# Altium PCB 2401_Test_Board_V1.1.PCBDOC (part 1 of 2)
Units mm, origin at the board's own origin, x right, y up, seen from the top; angles counter-clockwise.
Board outline 36.53 x 36.61 mm, 2 copper layers (Top Layer, Bottom Layer); 40 components, 34 nets, 129 pads, 21 vias.
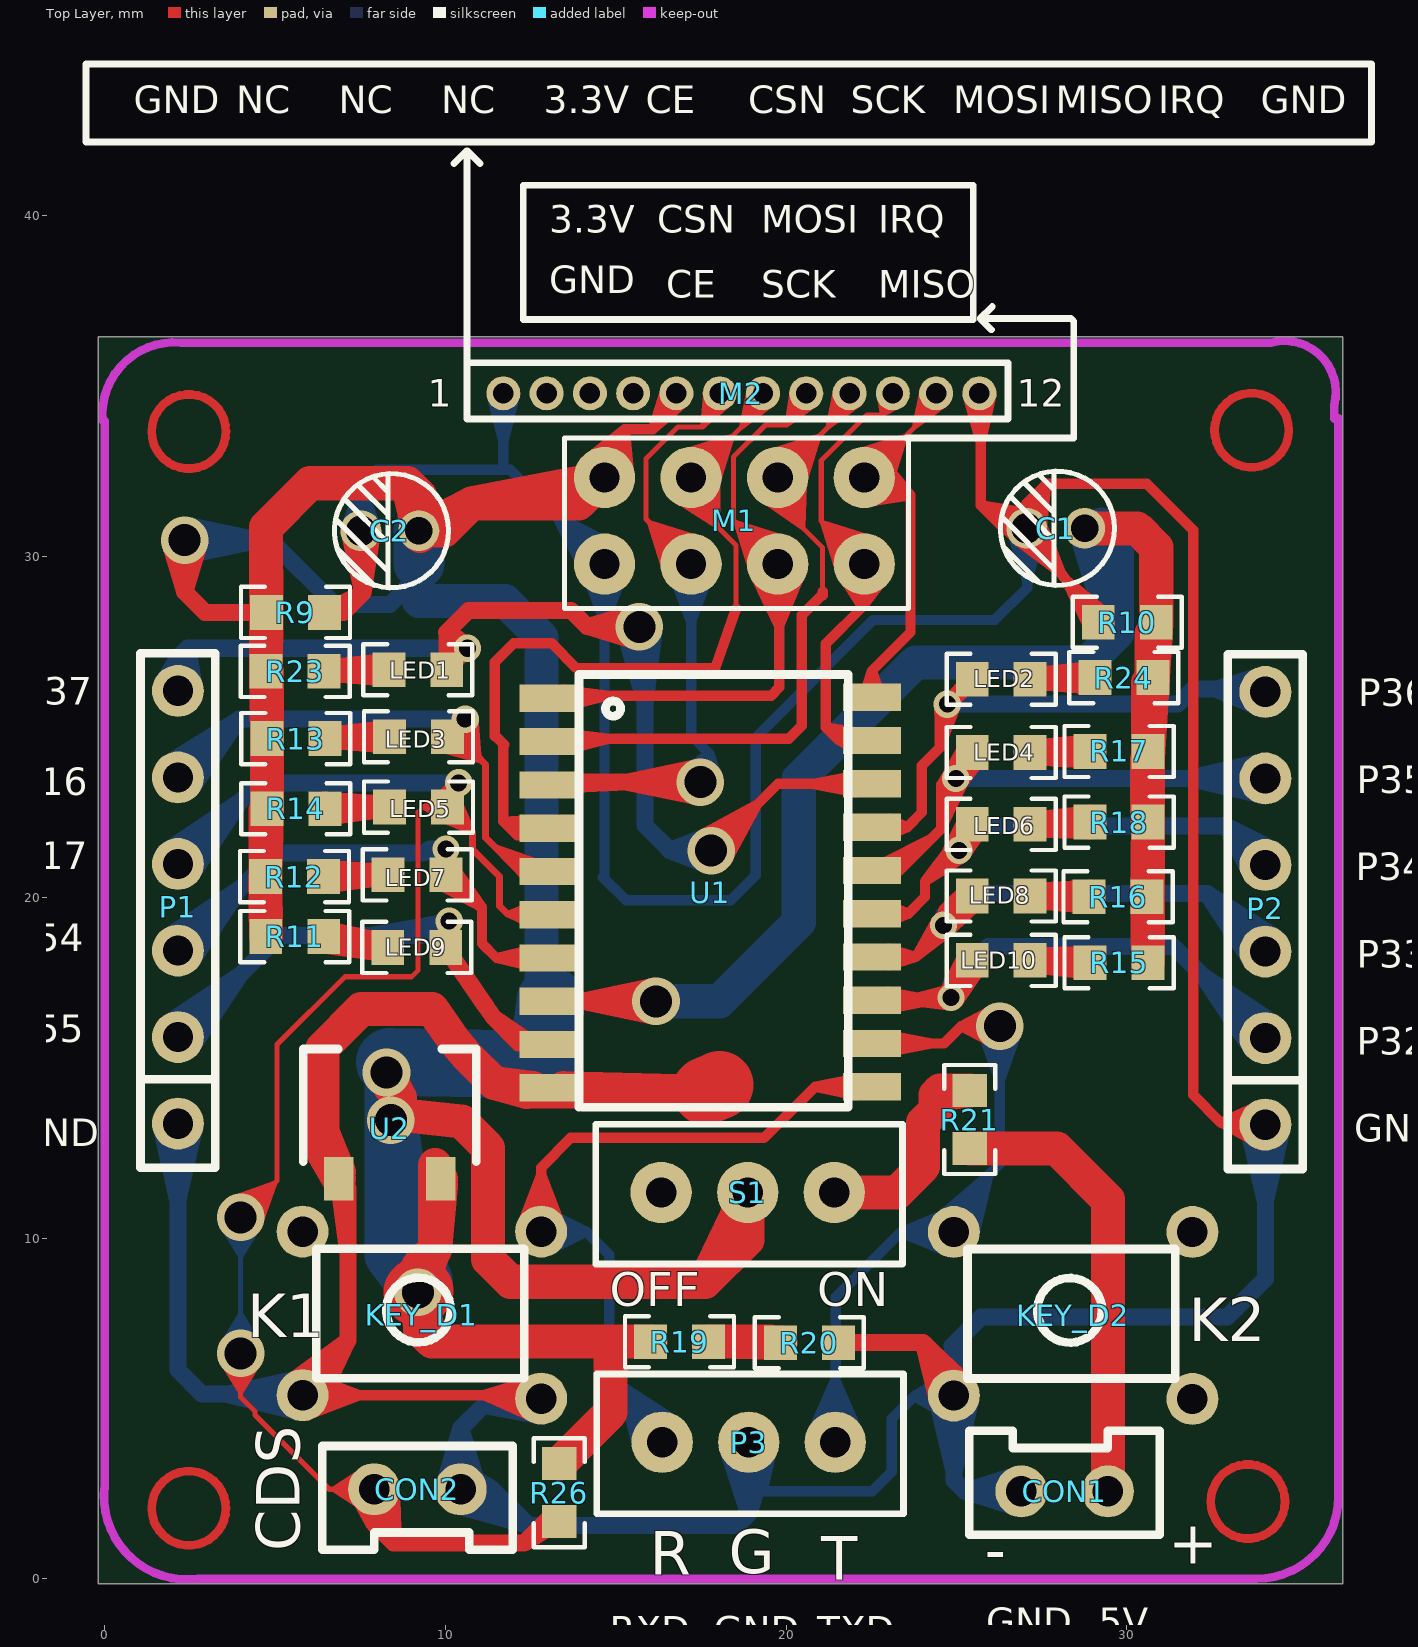
[diagram p0: Top Layer view]
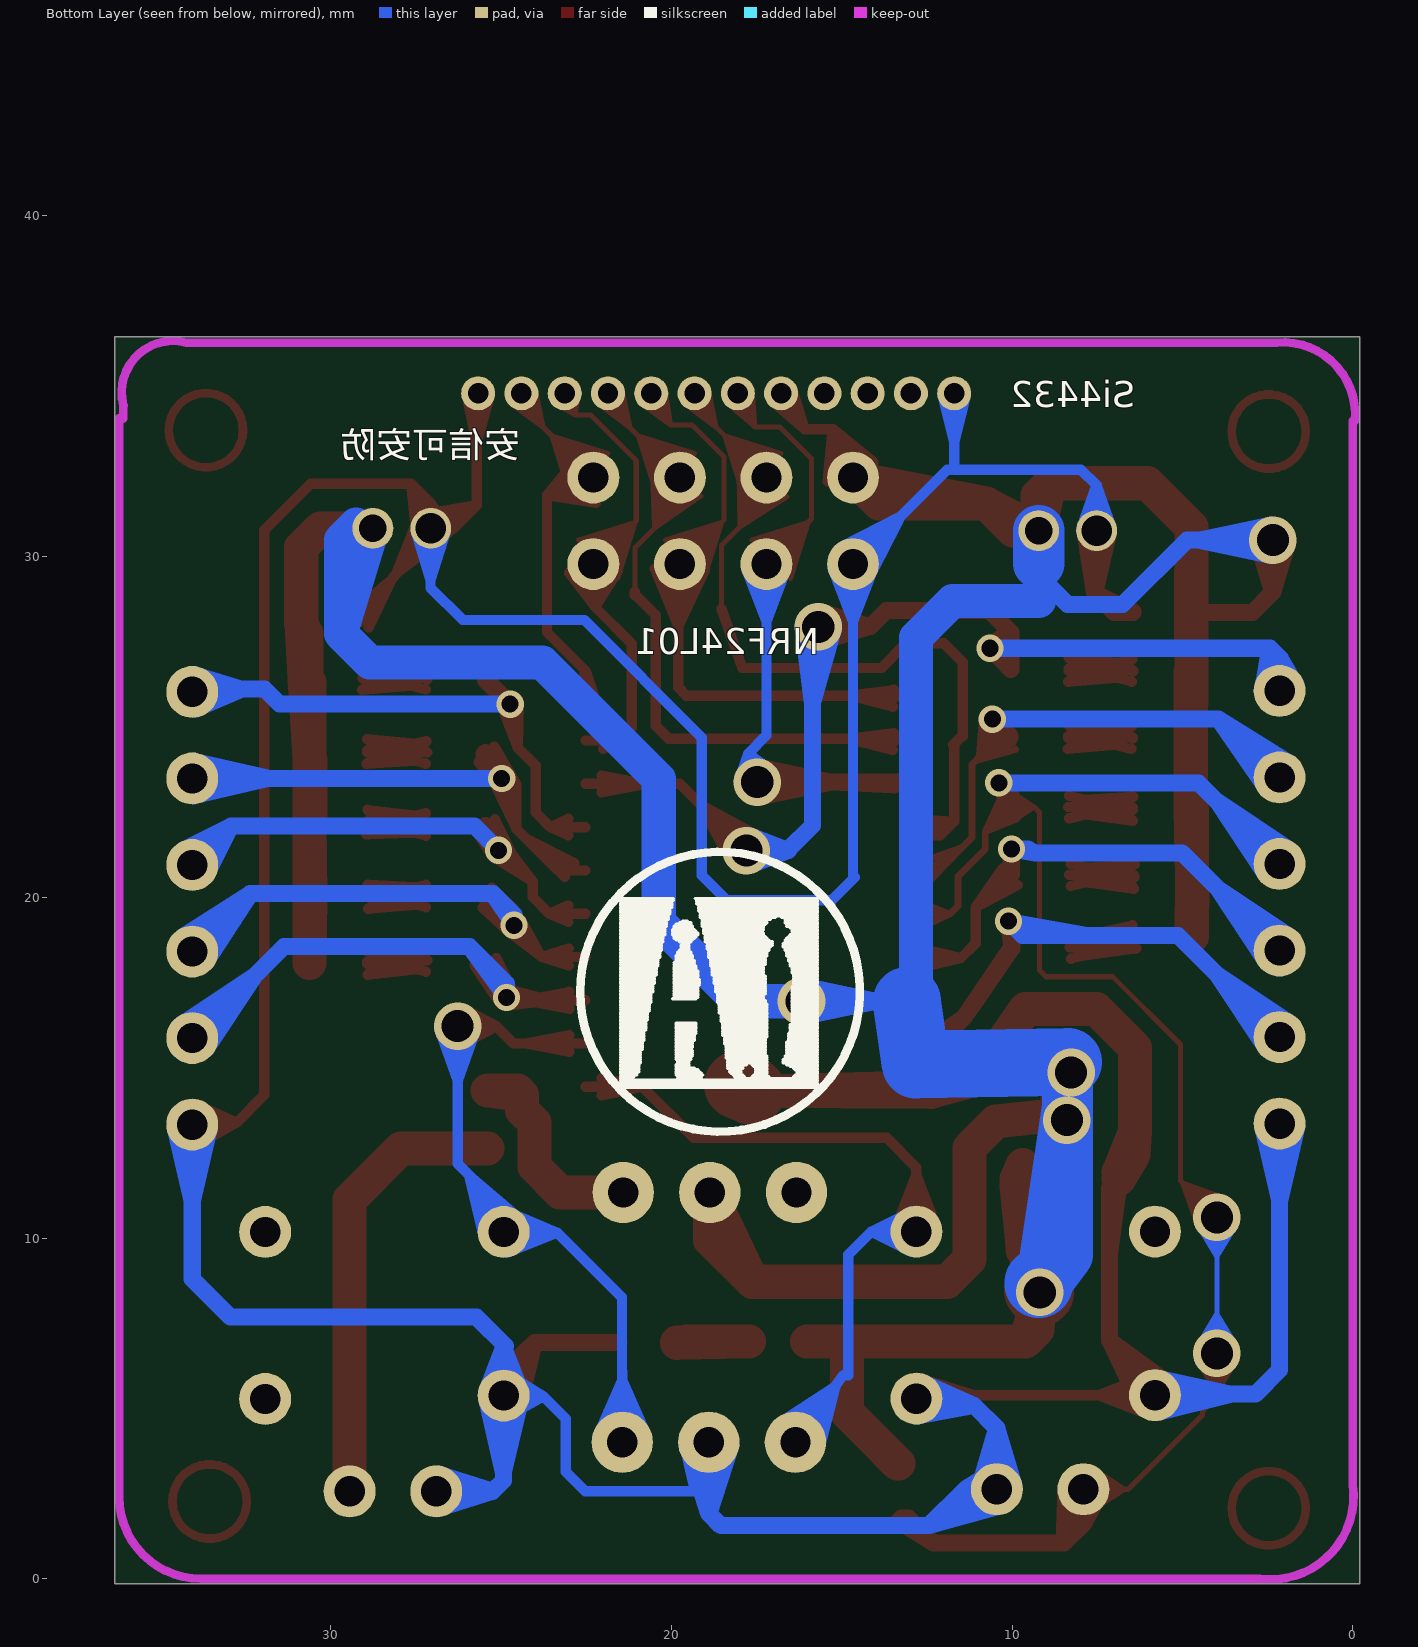
[diagram p1: Bottom Layer view, seen from below]

## Layer stack, top to bottom
Top Solder: solder mask 0.0102, Solder Resist, Dk 3.5
Top Layer: signal copper 0.0356
Dielectric 1: dielectric 0.32, FR-4, Dk 4.8
Bottom Layer: signal copper 0.0356
Bottom Solder: solder mask 0.0102, Solder Resist, Dk 3.5

## Board outline
-0.194,-0.149 36.337,-0.149 36.337,36.456 -0.194,36.456

## Design rules (kind name [scope] priority, off if disabled: settings)
Clearance [All] p1: gap=0.254
PolygonConnect [All] p1: connectstyle=Relief reliefconductorwidth=0.254 reliefentries=4 polygonreliefangle="90 Angle" airgapwidth=0.254
RoutingVias [All] p1: holewidth=0.711 width=1.27 viastyle="Through Hole" minholewidth=0.711 minwidth=1.27 maxholewidth=0.711 maxwidth=1.27
SolderMaskExpansion [All] p1: expansion=0.102
Width [All] p1: maxlimit=0.254 minlimit=0.254 preferedwidth=0.254
30 further rules are at their usual default settings.

## Components (designator, comment, footprint, x,y, rotation, side; value= is the part's Value field where it differs from the comment)
C1 "EC-7" EC-7 28.76,30.828 r180 top
C2 "EC-7" EC-7 9.22,30.758 r180 top
CON1 "2PIN" 2PIN 26.9,2.568 r0 top
CON2 "2PIN" 2PIN 10.45,2.628 r180 top
KEY_D1 "SW" SW 6.31,4.788 r0 top
KEY_D2 "SW" SW 25.42,4.778 r0 top
LED1 "0603-RES-A" 0603-RES-A 9.19,26.678 r180 top
LED2 "0603-RES-A" 0603-RES-A 26.31,26.398 r180 top
LED3 "0603-RES-A" 0603-RES-A 9.21,24.708 r180 top
LED4 "0603-RES-A" 0603-RES-A 26.31,24.248 r180 top
LED5 "0603-RES-A" 0603-RES-A 9.21,22.648 r180 top
LED6 "0603-RES-A" 0603-RES-A 26.31,22.138 r180 top
LED7 "0603-RES-A" 0603-RES-A 9.17,20.658 r180 top
LED8 "0603-RES-A" 0603-RES-A 26.31,20.038 r180 top
LED9 "0603-RES-A" 0603-RES-A 9.16,18.528 r180 top
LED10 "0603-RES-A" 0603-RES-A 26.31,18.148 r180 top
M1 "PIN2X4" PIN2X4 22.29,29.778 r180 top
M2 "4432" 4432 11.7,34.788 r0 top
P1 "6PIN" 6PIN 2.15,13.358 r90 top
P2 "6PIN" 6PIN 34.06,13.328 r90 top
P3 "SW3" SW3 21.44,4.008 r180 top
R9 "0603-RES-A" 0603-RES-A 5.6,28.358 r0 top
R10 "0603-RES-A" 0603-RES-A 30.01,28.068 r180 top
R11 "0603-RES-A" 0603-RES-A 5.58,18.848 r180 top
R12 "0603-RES-A" 0603-RES-A 5.57,20.608 r180 top
R13 "0603-RES-A" 0603-RES-A 5.61,24.658 r180 top
R14 "0603-RES-A" 0603-RES-A 5.61,22.598 r180 top
R15 "0603-RES-A" 0603-RES-A 29.77,18.078 r180 top
R16 "0603-RES-A" 0603-RES-A 29.74,20.018 r180 top
R17 "0603-RES-A" 0603-RES-A 29.77,24.278 r180 top
R18 "0603-RES-A" 0603-RES-A 29.77,22.208 r180 top
R19 "0603-RES-A" 0603-RES-A 16.87,6.958 r180 top
R20 "0603-RES-A" 0603-RES-A 20.68,6.928 r180 top
R21 "0603-RES-A" 0603-RES-A 25.39,13.478 r270 top
R23 "0603-RES-A" 0603-RES-A 5.59,26.628 r180 top
R24 "0603-RES-A" 0603-RES-A 29.91,26.448 r180 top
R26 "0603-RES-A" 0603-RES-A 13.34,2.528 r270 top
S1 "SW3" SW3 21.41,11.338 r180 top
U1 "SOP20" SOP20 15.22,14.438 r90 top
U2 "SOT89" SOT89 8.37,13.768 r0 top

## Footprints (in the part's own frame and the unit in brackets; to place one, negate y for a bottom-side part, rotate by r counter-clockwise, add the part's x,y. Pads: shape width x height; smd on the part's side, far side on the other; paste and mask are expansions set on the pad)
2PIN [mil]
  round 60 hole 35: 1(0,0) 2(100,0)
  silkscreen extent -60,-50 160,70
6PIN [mil]
  round 60 hole 35: 1(0,0) 2(100,0) 3(200,0) 4(300,0) 5(400,0) 6(500,0)
  silkscreen extent -51,-43 543,43
0603-RES-A [mil]
  rect 38x40 smd: 1(-33.5,0) 2(33.5,0)
  silkscreen extent -63,-30 63,30
4432 [mm]
  round 1 hole 0.6: 1(0,0) 2(1.27,0) 3(2.54,0) 4(3.81,0) 5(5.08,0) 6(6.35,0) 7(7.62,0) 8(8.89,0) 9(10.16,0) 10(11.43,0) 11(12.7,0) 12(13.97,0)
EC-7 [mm]
  round 1.2 hole 0.8: 1(0,0)
  round 1.2 hole 0.889: 2(1.7,0)
  silkscreen extent -0.88,-1.68 2.47,1.68
PIN2X4 [mm]
  round 1.8 / inner round 1.524 / far side round 1.524 hole 0.889: 1(0,0) 2(2.54,0) 3(5.08,0) 4(7.62,0) 5(0,-2.54) 6(2.54,-2.54) 7(5.08,-2.54) 8(7.62,-2.54)
  silkscreen extent -1.3,-3.7 8.8,1.3
SOP20 [mm]
  rect 0.8x1.7 smd: 1(0,-7.3) 2(1.27,-7.3) 3(2.54,-7.3) 4(3.81,-7.3) 5(5.08,-7.3) 6(6.35,-7.3) 7(7.62,-7.3) 8(8.89,-7.3) 9(10.16,-7.3) 10(11.43,-7.3) 11(11.4,2.2) 12(10.13,2.2) 13(8.86,2.2) 14(7.59,2.2) 15(6.32,2.2) 16(5.05,2.2) 17(3.78,2.2) 18(2.51,2.2) 19(1.24,2.2) 20(-0.03,2.2)
  silkscreen extent -0.6,-6.6 12.1,1.3
SOT89 [mil]
  rect 34x50 smd: 1(-59,-80) 3(59,-80)
  round 15 smd: 2(0,36.5)
  silkscreen extent -100,-60 100,70
SW [mil]
  round 60 hole 35: 1(-19.69,23.62) 2(255.91,212.6) 3(-19.69,212.6) 4(255.91,19.68)
  silkscreen extent -4,43 236,193
SW3 [mm]
  round 1.8 hole 0.889: 1(0,0) 2(2.54,0) 3(5.08,0)
  silkscreen extent -2,-2 7,2.1

## Via types
v1: diameter 1.397, hole 0.94, Top Layer to Bottom Layer, 11 vias
v2: diameter 0.8, hole 0.5, Top Layer to Bottom Layer, 10 vias

## Nets (pads, with @x,y where several pads share a name; then routed paths per layer and width w, separated by ;. In a path a pad name is that pad's centre, name@x,y a point inside that pad or via, vN(x,y) a via of type N, cw(c..) or ccw(c..) an arc to the next point about the centre after c; other vN are vias at no path point)
$$$3: LED3.2 R13.1 | length 26.1
  Top Layer w0.305: R13.1@6.461,24.658 6.511,24.708 LED3.2@8.359,24.708 ; R13.1@6.461,24.683 7.86,24.708 ; R13.1@6.494,25.012 7.86,24.708 ; R13.1@6.506,24.356 7.86,24.708 ; LED3.2@8.273,25.001 6.953,24.472 ; LED3.2@8.28,24.413 6.96,24.908 ; LED3.2@8.316,25.035 6.962,24.692 ; LED3.2@8.32,24.38 6.962,24.708 LED3.2@8.32,25.036 ; LED3.2@8.324,24.38 6.962,24.692 ; LED3.2@8.359,24.683 6.953,24.472 ; LED3.2@8.359,24.733 6.96,24.908 ; LED3.2@8.361,25.064 6.96,24.908 ; LED3.2@8.37,24.353 6.953,24.472 ; 6.962,24.692 LED3.2@8.359,24.708 ; 7.86,24.708 LED3.2@8.359,24.708 ; 7.86,24.708 LED3.2@8.25,25.02 ; 7.86,24.708 LED3.2@8.25,24.396 ; 7.86,24.708 LED3.2@8.359,24.708 ; 7.86,24.708 LED3.2@8.25,25.02 ; 7.86,24.708 LED3.2@8.25,24.396 ; 7.86,24.708 LED3.2@8.359,24.708 ; 7.86,24.708 LED3.2@8.25,25.02 ; 7.86,24.708 LED3.2@8.25,24.396
$$$4: LED5.2 R14.1 | length 20.4
  Top Layer w0.305: R14.1@6.444,22.953 7.848,22.862 ; R14.1@6.461,22.573 7.875,22.428 ; R14.1@6.461,22.598 6.511,22.648 LED5.2@8.359,22.648 ; R14.1@6.466,22.242 7.875,22.428 ; R14.1@6.494,22.952 7.86,22.648 ; R14.1@6.506,22.296 7.86,22.648 ; R14.1@6.533,22.895 7.875,22.428 ; R14.1@6.555,22.307 7.848,22.862 ; LED5.2@8.32,22.32 6.962,22.648 ; LED5.2@8.32,22.976 6.962,22.648 ; R14.1@6.461,22.623 7.86,22.648 ; R14.1@6.461,22.623 6.962,22.648 ; R14.1@6.461,22.623 7.848,22.862 ; R14.1@6.461,22.623 6.962,22.648 ; 6.962,22.648 6.585,22.317 6.962,22.648 ; 6.962,22.648 6.554,22.94 6.962,22.648
$$$5: LED7.2 R12.1 | length 20.4
  Top Layer w0.305: R12.1@6.404,20.963 7.808,20.872 ; R12.1@6.421,20.583 7.835,20.438 ; R12.1@6.421,20.608 6.471,20.658 LED7.2@8.319,20.658 ; R12.1@6.426,20.252 7.835,20.438 ; R12.1@6.454,20.962 7.82,20.658 ; R12.1@6.466,20.306 7.82,20.658 ; R12.1@6.493,20.905 7.835,20.438 ; R12.1@6.515,20.317 7.808,20.872 ; LED7.2@8.28,20.33 6.922,20.658 ; LED7.2@8.28,20.986 6.922,20.658 ; R12.1@6.421,20.633 7.82,20.658 ; R12.1@6.421,20.633 6.922,20.658 ; R12.1@6.421,20.633 7.808,20.872 ; R12.1@6.421,20.633 6.922,20.658 ; 6.922,20.658 6.545,20.327 6.922,20.658 ; 6.922,20.658 6.514,20.95 6.922,20.658
$$$6: LED9.2 R11.1 | length 19.3
  Top Layer w0.305: R11.1@6.352,18.502 LED9.2@7.947,18.278 ; R11.1@6.402,18.494 LED9.2@7.887,18.528 ; R11.1@6.457,18.519 LED9.2@8.114,18.818 ; R11.1@6.469,19.176 LED9.2@8.114,18.818 ; R11.1@6.532,19.137 LED9.2@7.887,18.528 ; R11.1@6.574,19.12 LED9.2@7.947,18.278 ; LED9.2@8.27,18.2 6.912,18.528 LED9.2@8.27,18.856 ; LED9.2@8.309,18.528 6.461,18.528 R11.1@6.431,18.848 LED9.2@8.114,18.818 ; LED9.2@7.887,18.528 6.431,18.823 LED9.2@7.947,18.278
$$$7: LED4.2 P2.5 U1.6 | length 44.6
  Top Layer w0.3: U1.6@22.52,20.788 23.33,20.788 24.55,22.008 24.55,23.309 ; U1.6@22.84,21.001 24.267,21.725 ; U1.6@22.97,20.788 24.267,21.725 ; U1.6@23.132,20.597 24.267,21.725 ; v2@24.735,23.539 24.55,22.025 ; v2@24.746,23.575 LED4.2@25.195,24.425 ; v2@24.789,23.649 LED4.2@25.459,24.248 ; v2@24.792,23.653 LED4.2@25.459,24.223 ; v2@24.871,23.713 LED4.2@25.663,23.96 ; v2@25.151,23.306 LED4.2@25.663,23.96 ; v2@25.207,23.383 LED4.2@25.459,24.223 ; v2@25.208,23.385 LED4.2@25.459,24.248 ; v2@25.213,23.398 24.55,22.025 ; v2@25.229,23.464 LED4.2@25.195,24.425 ; 24.55,22.025 v2(24.98,23.488) ; 24.55,23.309 LED4.2@25.459,24.223 ; 24.55,23.309 LED4.2@25.195,24.425 ; 24.55,23.309 LED4.2@25.663,23.96 ; 24.55,23.309 LED4.2@25.459,24.248 ; v2(24.98,23.488) LED4.2@25.459,24.223 ; v2(24.98,23.488) LED4.2@25.195,24.425 ; v2(24.98,23.488) LED4.2@25.459,24.248 ; v2(24.98,23.488) LED4.2@25.663,23.96
  Top Layer w0.5: LED4.2@25.459,24.223 v2(24.98,23.488) 25.5,24.008 25.5,24.207 LED4.2@25.459,24.248
  Bottom Layer w0.5: v2(24.98,23.488) P2.5@34.06,23.488 ; P2.5@34.002,22.979 31.798,23.488 P2.5@34.002,23.997
$$$8: LED6.2 P2.4 U1.5 | length 67.4
  Top Layer w0.3: U1.5@22.52,19.518 23.58,19.518 ; U1.5@22.97,19.518 23.58,19.518 ; U1.5@23.021,19.273 23.58,19.518 ; U1.5@23.021,19.763 23.58,19.518 ; v2@24.828,21.441 LED6.2@25.177,22.289 ; v2@24.885,21.546 24.07,20.458 ; v2@24.946,21.595 LED6.2@25.697,21.881 ; v2@25.222,21.179 24.07,20.458 ; v2@25.32,21.383 LED6.2@25.177,22.289 ; LED6.2@25.459,22.138 25.459,21.848 v2@25.095,21.483 ; 23.58,19.518 24.07,20.008 24.07,20.458 ; 24.07,20.458 v2(25.07,21.378) ; 24.07,20.458 v2@25.095,21.483 ; 24.493,20.881 v2(25.07,21.378) ; 24.493,20.881 v2@24.878,21.538 ; 24.493,20.881 v2@25.2,21.164 ; 24.493,20.881 v2(25.07,21.378) ; 24.493,20.881 v2@24.878,21.538 ; 24.493,20.881 v2@25.2,21.164 ; 24.493,20.881 v2(25.07,21.378) ; 24.493,20.881 v2@24.878,21.538 ; 24.493,20.881 v2@25.2,21.164 ; 24.493,20.881 LED6.2@25.459,22.113 ; 24.493,20.881 LED6.2@25.177,22.289 ; 24.493,20.881 LED6.2@25.697,21.881 ; v2@24.869,21.527 LED6.2@25.459,22.113 ; v2@24.869,21.527 LED6.2@25.459,22.113 ; v2@24.869,21.527 LED6.2@25.459,22.113 ; v2(25.07,21.378) LED6.2@25.459,22.113 ; v2(25.07,21.378) LED6.2@25.177,22.289 ; v2(25.07,21.378) LED6.2@25.697,21.881 ; v2(25.07,21.378) LED6.2@25.459,22.113 ; v2(25.07,21.378) LED6.2@25.141,22.209 ; v2(25.07,21.378) LED6.2@25.459,22.113 ; v2(25.07,21.378) LED6.2@25.141,22.209 ; v2(25.07,21.378) LED6.2@25.701,21.885 ; v2(25.07,21.378) LED6.2@25.701,21.885 ; v2@25.095,21.483 LED6.2@25.459,22.113 ; v2@25.095,21.483 LED6.2@25.141,22.209 ; v2@25.095,21.483 LED6.2@25.701,21.885 ; v2@25.095,21.483 LED6.2@25.459,22.113 ; v2@25.095,21.483 LED6.2@25.141,22.209 ; v2@25.095,21.483 LED6.2@25.701,21.885 ; LED6.2@25.141,22.209 25.319,21.394 LED6.2@25.141,22.209 ; LED6.2@25.141,22.209 24.827,21.436 LED6.2@25.141,22.209 ; v2@25.255,21.21 LED6.2@25.697,21.881 ; v2@25.255,21.21 LED6.2@25.701,21.885 ; v2@25.255,21.21 LED6.2@25.701,21.885 ; v2@25.306,21.296 LED6.2@25.459,22.113 ; v2@25.306,21.296 LED6.2@25.459,22.113 ; v2@25.306,21.296 LED6.2@25.459,22.113 ; LED6.2@25.701,21.885 24.946,21.595 LED6.2@25.701,21.885
  Top Layer w0.5: v2(25.07,21.378) LED6.2@25.459,22.113 ; v2(25.07,21.378) LED6.2@25.459,22.113 ; v2(25.07,21.378) LED6.2@25.459,22.113 ; v2(25.07,21.378) LED6.2@25.459,22.113 ; v2(25.07,21.378) v2@25.07,21.459 ; v2@25.07,21.459 LED6.2@25.459,22.113 ; v2@25.07,21.459 LED6.2@25.459,22.113 ; v2@25.07,21.459 25.095,21.483 LED6.2@25.459,22.113
  Bottom Layer w0.5: v2(25.07,21.378) 25.78,22.088 32.92,22.088 ; P2.4@33.645,20.648 32.92,22.088 ; P2.4@34.06,20.948 32.92,22.088 ; P2.4@34.36,21.363 32.92,22.088
$$$9: LED8.2 P2.3 U1.4 | length 50
  Top Layer w0.3: U1.4@22.52,18.248 23.81,18.248 ; U1.4@22.97,18.248 23.81,18.248 ; U1.4@23.007,18.001 23.81,18.248 ; U1.4@23.007,18.495 23.81,18.248 ; v2@24.408,19.31 LED8.2@25.01,20.038 ; v2@24.416,19.322 23.81,18.248 ; v2@24.418,19.325 LED8.2@25.272,20.287 ; v2@24.463,19.373 LED8.2@25.459,20.013 ; v2@24.525,19.409 LED8.2@25.539,19.69 ; v2@24.767,18.976 LED8.2@25.539,19.69 ; v2@24.791,18.996 23.81,18.248 ; v2@24.814,19.02 LED8.2@25.459,20.013 ; v2@24.847,19.073 LED8.2@25.272,20.287 ; v2@24.859,19.106 LED8.2@25.01,20.038 ; LED8.2@25.459,20.038 25.33,20.038 LED8.2@25.01,20.038 ; 23.81,18.248 v2(24.62,19.178) ; 23.81,18.248 24.6,19.038 24.6,19.628 ; 24.6,19.628 LED8.2@25.459,20.013 ; 24.6,19.628 LED8.2@25.272,20.287 ; 24.6,19.628 LED8.2@25.539,19.69 ; 24.6,19.628 LED8.2@25.01,20.038 ; v2(24.62,19.178) LED8.2@25.459,20.013 ; v2(24.62,19.178) LED8.2@25.272,20.287 ; v2(24.62,19.178) LED8.2@25.01,20.038 ; v2(24.62,19.178) LED8.2@25.539,19.69
  Top Layer w0.5: v2(24.62,19.178) 25.459,20.013 v2@24.62,19.328 ; v2(24.62,19.178) 25.33,20.038 v2@24.62,19.328 ; v2(24.62,19.178) v2@24.62,19.328
  Bottom Layer w0.5: P2.3@33.661,18.087 32.36,20.108 ; P2.3@34.381,18.807 32.36,20.108 ; 25.24,20.108 v2(24.62,19.178) 24.62,19.488 25.24,20.108 ; 25.24,20.108 32.36,20.108 ; 32.36,20.108 P2.3@34.06,18.408 32.36,20.108
$$$10: LED10.2 P2.2 U1.3 | length 52.9
  Top Layer w0.3: U1.3@22.52,16.978 24.89,16.978 v2@24.975,17.063 ; U1.3@22.97,16.978 24.27,16.978 ; U1.3@22.994,16.729 24.27,16.978 ; U1.3@22.994,17.227 24.27,16.978 ; v2@24.606,17.146 LED10.2@25.14,18.216 ; v2@24.638,17.205 LED10.2@25.459,18.123 ; v2@24.683,17.253 LED10.2@25.739,17.943 ; v2@24.718,17.276 25.46,17.548 ; v2@24.801,17.305 23.535,16.978 ; v2@24.831,16.808 23.535,16.978 ; v2@25.024,16.889 25.46,17.548 ; v2@25.032,16.898 LED10.2@25.739,17.943 ; v2@25.068,16.955 LED10.2@25.459,18.123 ; v2@25.087,17.021 LED10.2@25.14,18.216 ; LED10.2@25.459,18.148 25.46,18.147 25.46,17.548 ; 23.535,16.978 v2(24.84,17.058) ; v2(24.84,17.058) LED10.2@25.459,18.123 ; v2(24.84,17.058) LED10.2@25.14,18.216 ; v2(24.84,17.058) LED10.2@25.739,17.943 ; v2(24.84,17.058) 25.46,17.548 ; v2@24.975,17.063 LED10.2@25.459,18.123 ; v2@24.975,17.063 LED10.2@25.14,18.216 ; v2@24.975,17.063 LED10.2@25.739,17.943 ; v2@24.975,17.063 25.46,17.548 ; LED10.2@25.459,18.123 25.46,17.548 ; LED10.2@25.459,18.123 25.46,17.548 ; 25.46,17.548 25.141,18.026 25.46,17.548 ; 25.46,17.548 25.778,18.027 25.46,17.548
  Top Layer w0.5: v2(24.84,17.058) 24.97,17.058 v2@24.975,17.063
  Bottom Layer w0.5: P2.2@33.664,15.544 32.237,17.691 ; P2.2@34.384,16.264 32.237,17.691 ; 25.93,18.558 v2(24.84,17.058) 24.84,17.468 25.93,18.558 ; 25.93,18.558 31.37,18.558 P2.2@34.06,15.868 32.237,17.691
$$$11: CON2.2 LED5.1 P1.4 R26.2 U1.16 | length 131.6
  Top Layer w0.15: v1@3.39,6.449 3.99,5.47 ; v1@3.527,6.52 3.99,5.47 ; v1@3.655,11.134 5.007,11.625 ; v1@3.67,6.572 3.99,5.47 ; v1@3.715,10.993 5.007,11.625 ; v1@3.788,10.861 5.007,11.625 ; v1@3.817,6.605 3.99,5.47 ; v1@3.875,10.738 5.007,11.625 ; v1(3.99,6.618) 3.99,5.338 4.41,4.918 4.41,4.808 6.6,2.618 6.61,2.628 CON2.2@7.91,2.628 ; v1@4.12,10.493 5.007,11.625 ; v1@4.163,6.605 3.99,5.47 ; v1@4.243,10.406 5.007,11.625 ; v1@4.31,6.572 3.99,5.47 ; v1@4.375,10.333 5.007,11.625 ; v1@4.453,6.52 3.99,5.47 ; v1@4.516,10.273 5.007,11.625 ; v1@4.59,6.449 3.99,5.47 ; CON2.2@7.715,1.969 6.698,2.628 ; CON2.2@7.715,3.287 6.698,2.628 ; CON2.2@7.791,2.104 6.698,2.628 ; CON2.2@7.791,3.152 6.698,2.628 ; CON2.2@7.848,2.246 6.698,2.628 ; CON2.2@7.848,3.01 6.698,2.628 ; CON2.2@7.887,2.392 6.698,2.628 ; CON2.2@7.887,2.864 6.698,2.628 ; CON2.2@7.907,2.541 6.698,2.628 ; CON2.2@7.907,2.715 6.698,2.628 ; LED5.1@9.944,22.258 9.35,22.648 ; LED5.1@9.944,23.038 9.35,22.648 ; LED5.1@10.014,22.395 9.35,22.648 ; LED5.1@10.014,22.901 9.35,22.648 ; LED5.1@10.053,22.541 9.35,22.648 ; LED5.1@10.053,22.755 9.35,22.648 ; 5.007,11.625 v1(3.99,10.608) 5.06,11.678 5.06,15.678 7.05,17.668 9.01,17.668 9.2,17.858 9.2,22.498 9.35,22.648 ; 9.35,22.648 LED5.1@10.061,22.648 10.03,22.648 9.35,22.648
  Top Layer w0.2: LED5.1@9.852,22.302 10.791,21.918 ; LED5.1@9.946,22.48 10.791,21.918 ; LED5.1@10.061,22.623 10.791,21.918 ; LED5.1@10.061,22.648 10.791,21.918 ; LED5.1@10.199,22.742 10.791,21.918 ; LED5.1@10.374,22.843 10.791,21.918 ; U1.16@12.502,19.196 11.82,19.508 ; U1.16@12.518,19.783 11.82,19.508 ; U1.16@12.57,19.488 11.82,19.508 ; U1.16@12.6,19.488 12.58,19.508 11.82,19.508 ; 10.791,21.918 10.791,21.408 11.59,20.609 11.59,19.738 11.82,19.508
  Top Layer w0.3: U1.16@12.6,19.488 U1.16@13.02,19.488
  Top Layer w0.5: CON2.2@7.46,2.383 8.48,1.048 ; CON2.2@8.412,2.726 8.48,1.048 ; LED5.1@10.061,22.673 v2(10.39,23.358) ; R26.2@13.315,1.677 12.31,1.048 ; R26.2@13.34,1.677 13.239,1.778 13.04,1.778 12.31,1.048 ; 7.91,1.618 CON2.2@7.91,2.628 ; 7.91,1.618 7.415,2.498 7.91,1.618 ; 7.91,1.618 8.405,2.498 7.91,1.618 ; 7.91,1.618 8.48,1.048 ; 7.91,1.618 CON2.2@7.91,2.628 ; CON2.2@7.91,2.628 8.48,1.048 ; 8.48,1.048 12.31,1.048 ; v2(10.39,23.358) 10.03,22.648 10.03,22.998 v2(10.39,23.358)
  Bottom Layer w0.15: v1@3.39,6.787 3.99,7.766 ; v1@3.39,10.439 3.99,9.46 ; v1@3.527,6.716 3.99,7.766 ; v1@3.527,10.51 3.99,9.46 ; v1@3.67,6.664 3.99,7.766 ; v1@3.67,10.562 3.99,9.46 ; v1@3.817,6.631 3.99,7.766 ; v1@3.817,10.595 3.99,9.46 ; v1(3.99,6.618) v1(3.99,10.608) ; v1@4.163,6.631 3.99,7.766 ; v1@4.163,10.595 3.99,9.46 ; v1@4.31,6.664 3.99,7.766 ; v1@4.31,10.562 3.99,9.46 ; v1@4.453,6.716 3.99,7.766 ; v1@4.453,10.51 3.99,9.46 ; v1@4.59,6.787 3.99,7.766 ; v1@4.59,10.439 3.99,9.46
  Bottom Layer w0.5: P1.4@1.826,21.374 3.973,22.801 P1.4@2.546,20.654 ; P1.4@2.15,20.978 4.53,23.358 v2(10.39,23.358)
$$$12: LED7.1 P1.3 U1.17 | length 32.6
  Top Layer w0.3: LED7.1@9.832,20.359 11.07,19.708 ; LED7.1@10.021,20.633 11.07,19.708 ; LED7.1@10.021,20.658 10.035,20.673 10.161,20.798 9.98,20.798 11.07,19.708 ; LED7.1@10.269,20.854 11.07,19.708 ; U1.17@12.541,17.97 11.5,18.218 ; U1.17@12.541,18.466 11.5,18.218 ; U1.17@12.57,18.218 11.5,18.218 ; U1.17@13.02,18.218 11.5,18.218 ; 11.07,19.708 11.07,18.648 11.5,18.218
  Top Layer w0.5: v2(10.02,21.418) LED7.1@10.021,20.683 ; v2(10.02,21.418) LED7.1@10.021,20.683 ; v2(10.02,21.418) 10.035,20.673 v2@10.035,21.403 ; v2(10.02,21.418) LED7.1@10.021,20.683 ; v2(10.02,21.418) v2@10.035,21.403 ; LED7.1@10.021,20.683 v2@10.035,21.403 ; LED7.1@10.021,20.683 v2@10.035,21.403
  Bottom Layer w0.5: P1.3@1.826,18.834 3.973,20.261 P1.3@2.546,18.114 ; P1.3@2.15,18.438 5.01,21.298 9.33,21.298 ; 9.33,21.298 v2(10.02,21.418) 9.54,21.418 9.33,21.298
$$$13: LED9.1 P1.2 U1.19 | length 33.9
  Top Layer w0.5: LED9.1@10.011,18.503 11.199,16.779 ; U1.19@13.02,15.678 12.181,15.758 12.151,15.728 ; LED9.1@10.011,18.528 v2(10.11,19.298) ; LED9.1@10.011,18.528 v2@10.011,19.089 ; LED9.1@10.011,18.528 11.411,16.468 ; LED9.1@10.011,18.553 v2(10.11,19.298) ; LED9.1@10.011,18.553 v2(10.11,19.298) ; LED9.1@10.011,18.553 v2(10.11,19.298) ; LED9.1@10.011,18.553 v2(10.11,19.298) ; LED9.1@10.011,18.553 v2(10.11,19.298) ; LED9.1@10.011,18.553 v2@10.011,19.089 ; LED9.1@10.011,18.553 v2@10.011,19.089 ; LED9.1@10.011,18.553 v2@10.05,19.128 ; LED9.1@10.011,18.553 v2@10.05,19.128 ; LED9.1@10.011,18.553 v2(10.11,19.298) ; v2@10.011,19.089 v2@10.05,19.128 ; v2@10.05,19.128 v2(10.11,19.298) ; 11.411,16.468 U1.19@12.57,15.678 ; 11.411,16.468 12.151,15.728 ; 12.151,15.728 U1.19@12.57,15.678 ; 12.151,15.728 U1.19@12.57,15.678
  Bottom Layer w0.5: P1.2@1.826,16.294 3.973,17.721 P1.2@2.546,15.574 ; P1.2@2.15,15.898 5.13,18.878 9.69,18.878 v2(10.11,19.298) 7.803,18.878
$$$14: LED4.1 R17.2 | length 21.4
  Top Layer w0.305: LED4.1@27.193,24.577 R17.2@28.558,24.278 ; LED4.1@27.207,23.921 R17.2@28.558,24.278 ; R17.2@28.824,24.569 LED4.1@27.522,24.004 ; R17.2@28.834,23.984 LED4.1@27.521,24.505 ; R17.2@28.875,24.605 LED4.1@27.522,24.256 ; R17.2@28.88,23.95 27.522,24.278 R17.2@28.88,24.606 ; R17.2@28.885,23.95 LED4.1@27.522,24.256 ; R17.2@28.919,24.253 LED4.1@27.522,24.004 ; R17.2@28.919,24.303 LED4.1@27.521,24.505 ; R17.2@28.928,24.633 LED4.1@27.521,24.505 ; R17.2@28.939,23.923 LED4.1@27.522,24.004 ; LED4.1@27.522,24.256 R17.2@28.919,24.278 27.191,24.278 LED4.1@27.161,24.248 R17.2@28.558,24.278
$$$15: LED6.1 R18.2 | length 17.3
  Top Layer w0.305: LED6.1@27.161,22.138 28.77,22.138 28.84,22.208 R18.2@28.919,22.208 ; LED6.1@27.2,21.81 28.558,22.138 LED6.1@27.2,22.466 ; R18.2@28.814,22.495 LED6.1@27.544,21.893 ; R18.2@28.844,21.912 LED6.1@27.487,22.397 ; R18.2@28.87,22.509 LED6.1@27.518,22.138 ; R18.2@28.891,21.854 LED6.1@27.518,22.138 ; R18.2@28.919,22.233 LED6.1@27.487,22.397 ; R18.2@28.919,22.564 LED6.1@27.487,22.397 ; R18.2@28.949,21.854 LED6.1@27.544,21.893 ; LED6.1@27.518,22.138 28.919,22.183 LED6.1@27.544,21.893
$$$16: LED8.1 R16.2 | length 17.2
  Top Layer w0.305: LED8.1@27.161,20.038 28.869,20.038 R16.2@28.889,20.018 LED8.1@27.492,20.038 ; LED8.1@27.2,19.71 28.558,20.038 LED8.1@27.2,20.366 ; R16.2@28.793,19.728 LED8.1@27.503,20.293 ; R16.2@28.802,20.311 LED8.1@27.488,19.78 ; R16.2@28.845,19.691 LED8.1@27.492,20.038 ; R16.2@28.855,20.346 LED8.1@27.492,20.038 ; R16.2@28.889,19.993 LED8.1@27.488,19.78 ; R16.2@28.889,20.043 LED8.1@27.503,20.293 ; R16.2@28.9,19.663 LED8.1@27.488,19.78 ; R16.2@28.909,20.373 LED8.1@27.503,20.293
$$$17: LED10.1 R15.2 | length 17.3
  Top Layer w0.305: LED10.1@27.161,18.148 28.849,18.148 R15.2@28.919,18.078 ; LED10.1@27.2,17.82 28.558,18.148 LED10.1@27.2,18.476 ; R15.2@28.814,17.791 LED10.1@27.544,18.393 ; R15.2@28.844,18.374 LED10.1@27.487,17.889 ; R15.2@28.87,17.777 LED10.1@27.519,18.148 ; R15.2@28.891,18.432 LED10.1@27.519,18.148 ; R15.2@28.919,17.722 LED10.1@27.487,17.889 ; R15.2@28.919,18.053 LED10.1@27.487,17.889 ; R15.2@28.949,18.432 LED10.1@27.544,18.393 ; LED10.1@27.519,18.148 28.919,18.103 LED10.1@27.544,18.393
$$$18: KEY_D1.2 P3.3 U1.1 | length 47.7
  Top Layer w0.305: KEY_D1.2@12.211,10.299 12.81,11.864 ; KEY_D1.2@12.506,10.216 12.81,11.864 ; KEY_D1.2@13.114,10.216 12.81,11.864 ; KEY_D1.2@13.409,10.299 12.81,11.864 ; U1.1@22.045,14.192 20.85,14.438 ; U1.1@22.045,14.684 20.85,14.438 ; U1.1@22.07,14.438 20.85,14.438 ; U1.1@22.52,14.438 20.85,14.438 ; 12.81,11.864 KEY_D1.2@12.81,10.188 12.81,12.068 13.68,12.938 19.35,12.938 20.85,14.438
  Bottom Layer w0.305: KEY_D1.2@12.845,9.885 14.13,10.188 ; KEY_D1.2@12.845,10.491 14.13,10.188 ; KEY_D1.2@12.951,9.595 14.13,10.188 ; KEY_D1.2@12.951,10.781 14.13,10.188 ; P3.3@15.682,3.693 15.184,5.652 ; P3.3@15.974,3.791 15.184,5.652 ; P3.3@16.36,4.008 14.95,5.978 14.81,5.978 14.81,9.508 14.13,10.188 ; P3.3@16.69,4.304 15.184,5.652 ; P3.3@16.877,4.548 15.184,5.652 ; 14.13,10.188 KEY_D1.2@12.81,10.188 14.13,10.188
$$$19: KEY_D2.3 P3.1 U1.2 | length 58.9
  Top Layer w0.305: U1.2@22.52,15.708 24.63,15.708 25.14,16.218 ; U1.2@22.97,15.708 24.284,15.708 ; U1.2@22.993,15.462 24.284,15.708 ; U1.2@22.993,15.954 24.284,15.708 ; v1@26.138,15.688 25.14,16.218 ; v1@26.138,16.748 25.14,16.218 ; v1@26.244,15.978 25.14,16.218 ; v1@26.244,16.458 25.14,16.218 ; v1(26.27,16.218) 25.14,16.218
  Bottom Layer w0.305: P3.1@20.709,4.164 21.444,5.822 ; P3.1@21.001,4.063 21.444,5.822 ; P3.1@21.44,4.008 21.45,8.258 23.35,10.158 ; P3.1@21.88,4.061 21.444,5.822 ; P3.1@22.172,4.16 21.444,5.822 ; KEY_D2.3@24.455,10.573 25.934,11.842 ; KEY_D2.3@24.673,10.356 25.934,11.842 ; KEY_D2.3@24.794,10.774 23.35,10.158 ; KEY_D2.3@24.809,9.579 23.35,10.158 ; KEY_D2.3@24.887,10.481 23.35,10.158 ; KEY_D2.3@24.894,9.874 23.35,10.158 ; KEY_D2.3@25.192,10.04 25.934,11.842 ; KEY_D2.3@25.484,9.946 25.934,11.842 ; v1@25.732,16.126 26.27,14.605 ; v1@26.029,16.2 26.27,14.605 ; v1(26.27,16.218) 26.27,12.178 24.89,10.798 24.92,10.768 KEY_D2.3@24.92,10.178 ; v1@26.511,16.2 26.27,14.605 ; v1@26.808,16.126 26.27,14.605 ; 23.35,10.158 KEY_D2.3@24.92,10.178 ; 23.35,10.158 24.9,10.158 KEY_D2.3@24.92,10.178 ; KEY_D2.3@24.92,10.178 25.934,11.842
$$$20: CON1.2 R21.2 | length 15.8
  Top Layer w1: R21.2@25.39,12.627 27.94,12.627 ; R21.2@25.415,12.627 27.94,12.627 ; CON1.2@29.44,2.568 29.44,11.127 27.94,12.627
$$$21: R21.1 S1.1 | length 8.9
  Top Layer w0.305: R21.1@25.39,14.329 R21.1@25.39,14.329
  Top Layer w1: S1.1@21.41,11.338 23.26,11.338 24.02,12.098 24.02,13.388 24.38,13.748 24.38,14.198 ; R21.1@25.39,14.329 24.51,14.328 ; 24.38,14.198 R21.1@25.365,14.329 ; 24.38,14.198 24.51,14.328 ; 24.51,14.328 R21.1@25.365,14.329 ; 24.51,14.328 R21.1@25.365,14.329
$$$23: LED1.2 R23.1 | length 26.1
  Top Layer w0.305: R23.1@6.441,26.628 6.491,26.678 LED1.2@8.339,26.678 ; R23.1@6.441,26.653 7.84,26.678 ; R23.1@6.474,26.982 7.84,26.678 ; R23.1@6.486,26.326 7.84,26.678 ; LED1.2@8.253,26.971 6.933,26.442 ; LED1.2@8.26,26.383 6.94,26.878 ; LED1.2@8.296,27.005 6.942,26.662 ; LED1.2@8.3,26.35 6.942,26.678 LED1.2@8.3,27.006 ; LED1.2@8.304,26.35 6.942,26.662 ; LED1.2@8.339,26.653 6.933,26.442 ; LED1.2@8.339,26.703 6.94,26.878 ; LED1.2@8.341,27.034 6.94,26.878 ; LED1.2@8.35,26.323 6.933,26.442 ; 6.942,26.662 LED1.2@8.339,26.678 ; 7.84,26.678 LED1.2@8.339,26.678 ; 7.84,26.678 LED1.2@8.23,26.99 ; 7.84,26.678 LED1.2@8.23,26.366 ; 7.84,26.678 LED1.2@8.339,26.678 ; 7.84,26.678 LED1.2@8.23,26.99 ; 7.84,26.678 LED1.2@8.23,26.366 ; 7.84,26.678 LED1.2@8.339,26.678 ; 7.84,26.678 LED1.2@8.23,26.99 ; 7.84,26.678 LED1.2@8.23,26.366
$$$24: LED2.1 R24.2 | length 26.1
  Top Layer w0.305: LED2.1@27.161,26.398 27.211,26.448 R24.2@29.059,26.448 ; LED2.1@27.161,26.423 28.56,26.448 ; LED2.1@27.194,26.752 28.56,26.448 ; LED2.1@27.206,26.096 28.56,26.448 ; R24.2@28.973,26.741 27.653,26.212 ; R24.2@28.98,26.153 27.66,26.648 ; R24.2@29.016,26.775 27.662,26.432 ; R24.2@29.02,26.12 27.662,26.448 R24.2@29.02,26.776 ; R24.2@29.024,26.12 27.662,26.432 ; R24.2@29.059,26.423 27.653,26.212 ; R24.2@29.059,26.473 27.66,26.648 ; R24.2@29.061,26.804 27.66,26.648 ; R24.2@29.07,26.093 27.653,26.212 ; 27.662,26.432 R24.2@29.059,26.448 ; 28.56,26.448 R24.2@29.059,26.448 ; 28.56,26.448 R24.2@28.95,26.76 ; 28.56,26.448 R24.2@28.95,26.136 ; 28.56,26.448 R24.2@29.059,26.448 ; 28.56,26.448 R24.2@28.95,26.76 ; 28.56,26.448 R24.2@28.95,26.136 ; 28.56,26.448 R24.2@29.059,26.448 ; 28.56,26.448 R24.2@28.95,26.76 ; 28.56,26.448 R24.2@28.95,26.136
$$$26: S1.2 U2.2 | length 24.2
  Top Layer w1: U2.2@8.37,14.695 v1@8.56,14.018 ; U2.2@8.37,14.695 8.67,14.128 ; U2.2@8.37,14.695 v1@8.41,14.388 ; U2.2@8.37,14.695 8.67,14.128 ; U2.2@8.37,14.695 v1@8.41,14.388 ; U2.2@8.37,14.695 8.41,14.655 v1@8.41,14.388 ; v1@8.41,14.388 8.67,14.128 ; v1@8.56,14.018 8.56,13.628 10.48,13.418 11.25,12.648 11.25,9.378 11.91,8.718 17.49,8.718 17.62,8.708 ; v1@8.56,14.018 8.67,14.128 ; 17.62,8.708 S1.2@18.87,11.338 ; 17.62,8.708 18.86,9.948 ; 18.86,9.948 S1.2@18.87,11.338 ; 18.86,9.948 S1.2@18.87,11.338
  other v1: 8.397,13.462 8.27,14.859
$$$30: LED2.2 P2.6 U1.7 | length 26.7
  Top Layer w0.3: U1.7@22.52,22.058 23.55,22.058 ; U1.7@22.97,22.058 23.55,22.058 ; U1.7@23.024,21.814 23.55,22.058 ; U1.7@23.024,22.302 23.55,22.058 ; v2@24.481,25.686 24.51,24.388 ; v2(24.73,25.668) 24.51,24.388 ; v2(24.73,25.668) 24.51,25.449 24.51,24.388 ; v2@24.971,25.602 24.51,24.388 ; 23.55,22.058 23.98,22.488 23.98,23.858 24.51,24.388
  Top Layer w0.5: LED2.2@25.459,26.373 v2(24.73,25.668) LED2.2@25.459,26.398
  Bottom Layer w0.5: v2(24.73,25.668) 31.5,25.668 31.94,26.108 32.6,26.108 ; P2.6@33.943,25.53 32.6,26.108 ; P2.6@33.998,26.536 32.6,26.108 ; 32.6,26.108 P2.6@34.06,26.028 33.98,26.108 32.6,26.108
$$$31: LED1.1 P1.6 U1.8 | length 92
  Top Layer w0.305: v1@17.473,21.806 19.145,22.713 ; v1@17.641,21.549 19.145,22.713 ; v1(17.8,21.368) 19.76,23.328 U1.8@22.52,23.328 ; v1@17.981,21.209 19.145,22.713 ; v1@18.238,21.041 19.145,22.713 ; U1.8@22.047,23.082 20.756,23.328 ; U1.8@22.047,23.574 20.756,23.328 ; U1.8@22.07,23.328 20.756,23.328
  Top Layer w0.5: v1@15.621,27.495 14.16,27.948 ; v1@15.627,28.382 14.16,27.948 ; LED1.1@10.041,26.703 v2(10.65,27.308) ; LED1.1@10.041,26.703 v2(10.65,27.308) ; LED1.1@10.041,26.703 v2(10.65,27.308) ; LED1.1@10.041,26.703 v2(10.65,27.308) ; LED1.1@10.041,26.703 v2(10.65,27.308) ; LED1.1@10.041,26.703 v2(10.65,27.308) ; LED1.1@10.041,26.703 v2(10.65,27.308) ; LED1.1@10.041,26.703 v2(10.65,27.308) ; LED1.1@10.041,26.703 v2(10.65,27.308) ; LED1.1@10.041,26.703 v2@10.65,27.309 ; LED1.1@10.041,26.703 10.361,27.598 ; LED1.1@10.041,26.703 v2@10.65,27.309 ; LED1.1@10.041,26.703 10.041,27.278 ; LED1.1@10.041,26.703 10.361,27.598 ; LED1.1@10.041,26.703 10.041,27.278 ; LED1.1@10.041,26.703 10.041,27.278 ; LED1.1@10.041,26.703 10.041,27.757 ; 10.041,27.278 v2(10.65,27.308) ; 10.041,27.278 v2(10.65,27.308) ; 10.041,27.278 v2(10.65,27.308) ; 10.041,27.278 v2(10.65,27.308) ; 10.041,27.278 v2(10.65,27.308) ; 10.041,27.278 v2(10.65,27.308) ; 10.041,27.278 10.361,27.598 ; 10.041,27.278 LED1.1@10.041,26.678 v2(10.65,27.308) ; 10.041,27.278 10.041,27.757 ; 10.041,27.757 v2(10.65,27.308) ; 10.041,27.757 v2(10.65,27.308) ; 10.041,27.757 10.03,27.768 10.68,28.418 13.69,28.418 14.16,27.948 ; 10.361,27.598 v2@10.65,27.309 ; 14.16,27.948 v1(15.69,27.938) 15.68,27.948 14.16,27.948
  Bottom Layer w0.5: P1.6@1.683,26.268 2.43,27.308 ; P1.6@2.662,26.048 2.43,27.308 ; v2(10.65,27.308) 2.43,27.308 ; v1@15.248,27.86 15.86,25.683 ; v1@16.138,27.927 15.86,25.683 ; v1@17.718,20.927 16.57,21.368 ; v1@17.718,21.809 16.57,21.368 ; v1(17.8,21.368) 16.57,21.368 ; 2.13,27.008 P1.6@2.15,26.058 ; 2.13,27.008 2.64,26.206 2.13,27.008 ; 2.13,27.008 1.654,26.186 2.13,27.008 ; 2.13,27.008 P1.6@2.15,26.058 ; 2.13,27.008 2.15,26.988 ; 2.13,27.008 2.43,27.308 ; P1.6@2.15,26.058 2.43,27.308 ; P1.6@2.15,26.058 2.15,26.988 ; P1.6@2.15,26.058 2.15,26.988 ; 2.15,26.988 2.642,26.199 2.15,26.988 ; 2.15,26.988 1.658,26.199 2.15,26.988 ; 15.86,25.683 v1(15.69,27.938) 15.77,28.018 15.25,28.018 15.86,27.408 15.86,22.108 16.57,21.398 16.57,21.368